# Altium PCB Barracuda3D.PcbDoc (part 2 of 3)
Units mil, origin at the board's own origin, x right, y up, seen from the top; angles counter-clockwise.
Board outline 4143.89 x 2810.03 mil, 5 copper layers (Top Layer, Mid-Layer 1, Groun Plane, Power Plane, Bottom Layer), stack 75.73 mil thick; 242 components, 180 nets, 863 pads, 455 vias.
Unrouted connection lines stored in the file: 270.
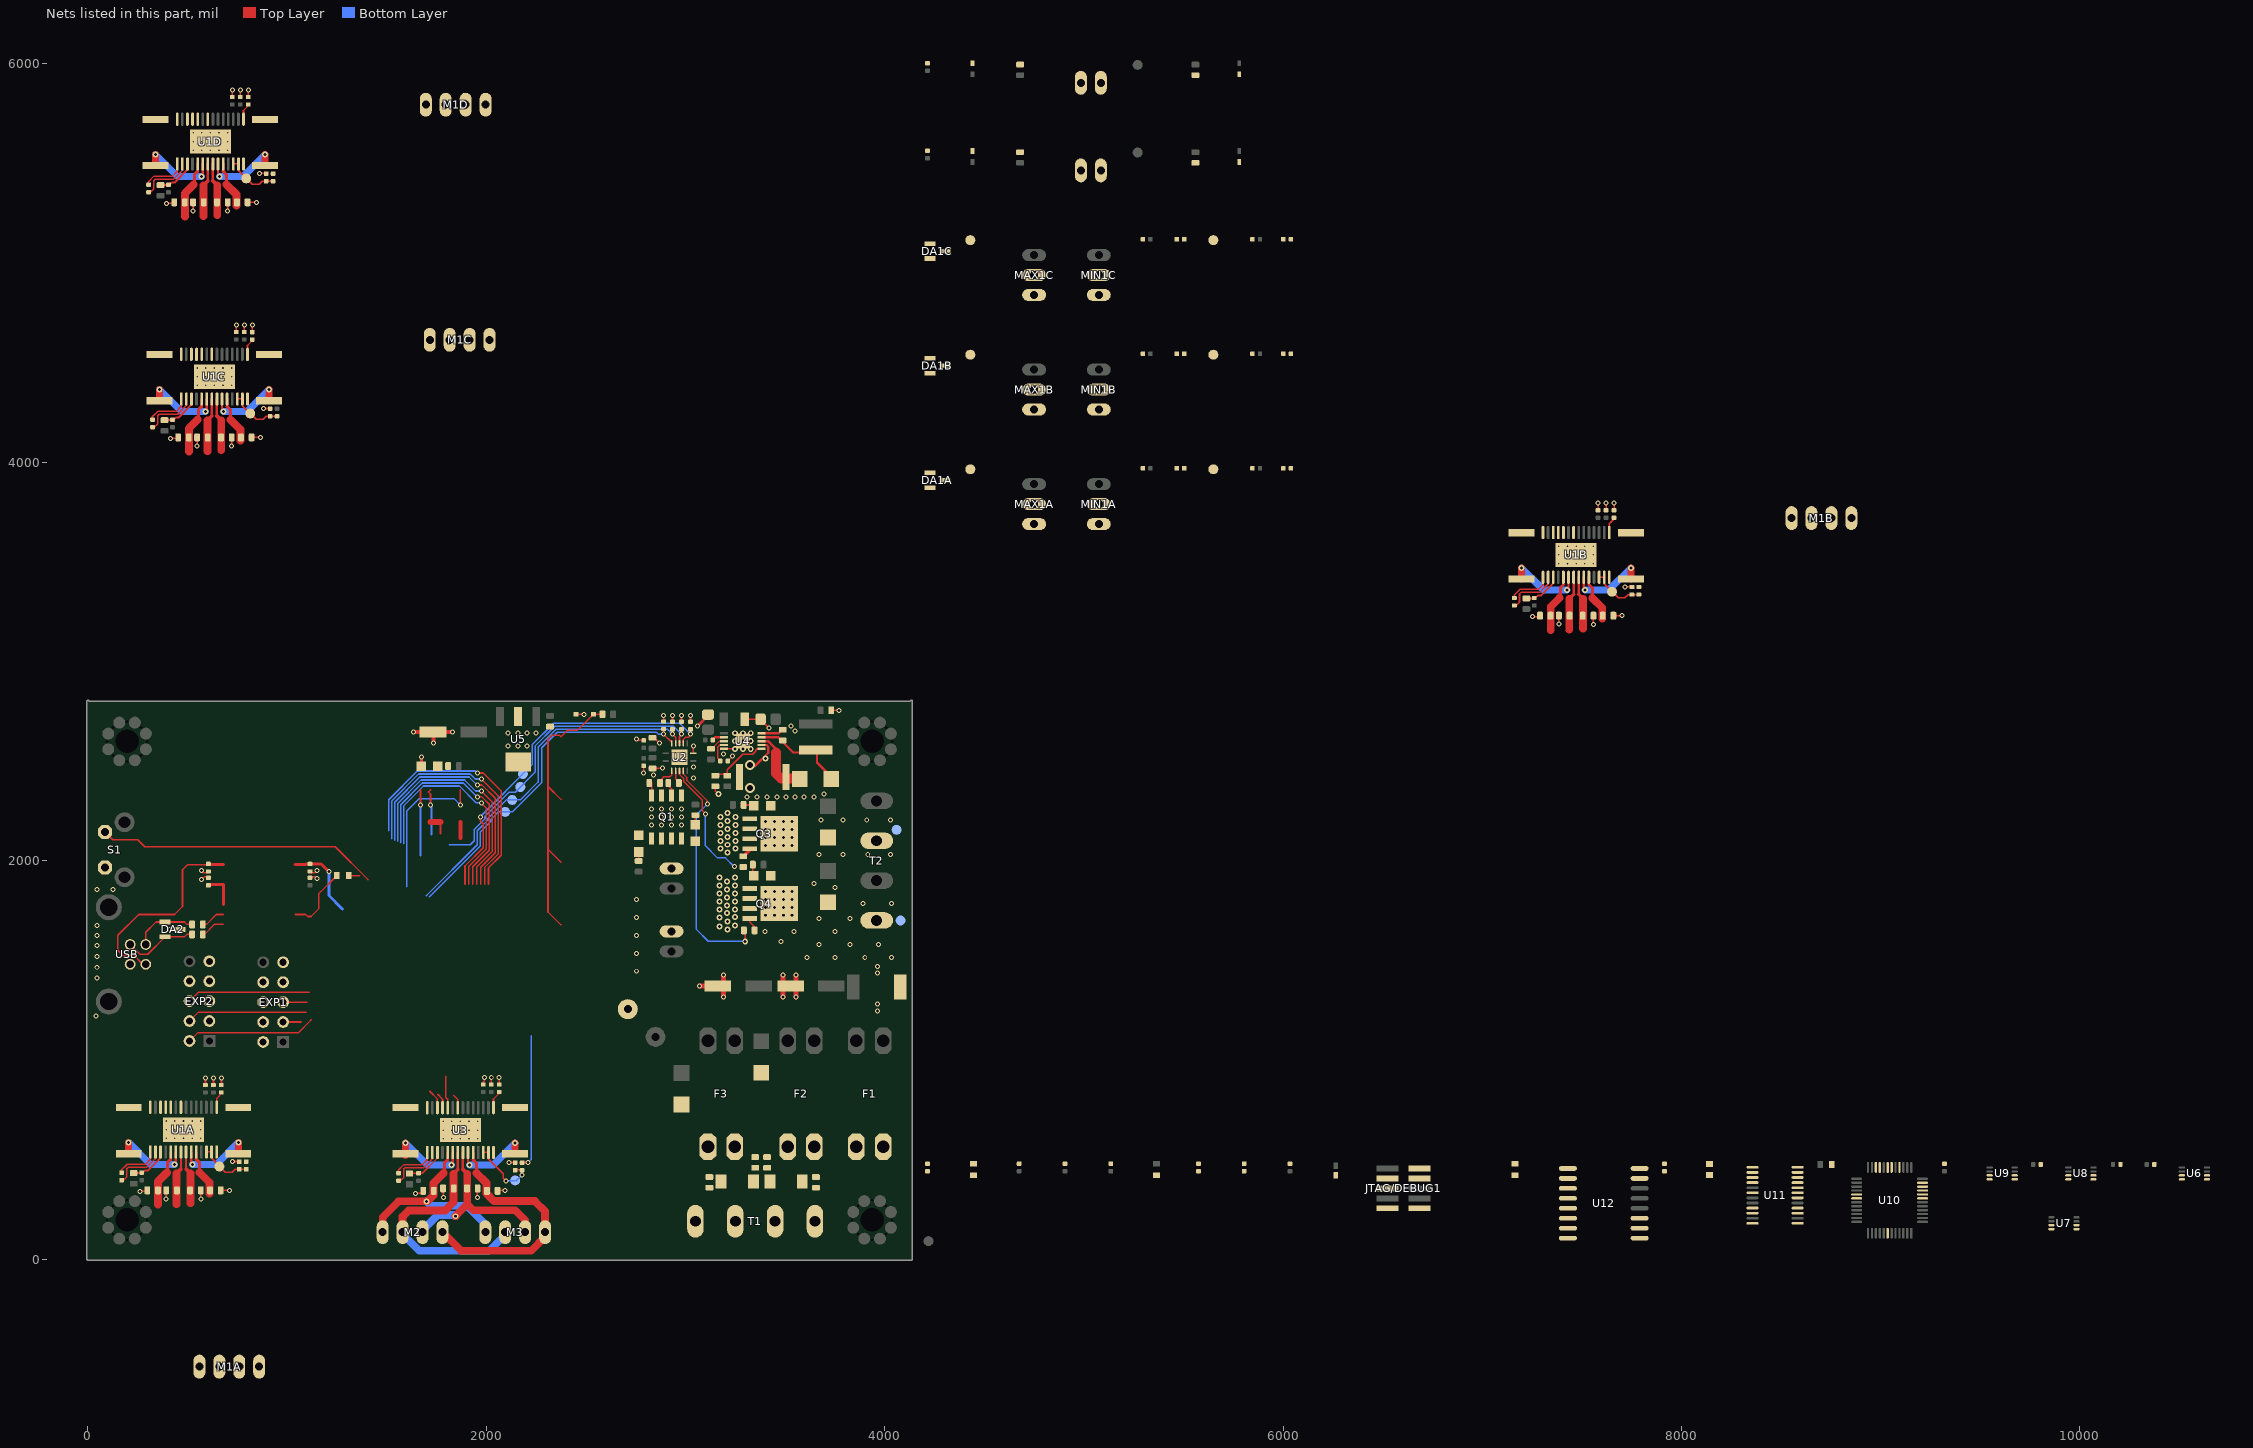
[diagram p4: the nets of this part, all layers, seen from the top]

## Via types
v1: diameter 25, hole 15, Top Layer to Bottom Layer, 207 vias
v2: diameter 30, hole 15, Top Layer to Bottom Layer, tented both sides, 81 vias
v3: diameter 19.68, hole 7.87, Top Layer to Bottom Layer, 79 vias
v4: diameter 25, hole 15, Top Layer to Bottom Layer, tented both sides, 44 vias
v5: diameter 30, hole 15, Top Layer to Bottom Layer, tented bottom, 32 vias
v6: diameter 30, hole 15, Top Layer to Bottom Layer, 10 vias
v7: diameter 50, hole 30, Top Layer to Bottom Layer, 2 vias

## Nets (pads, with @x,y where several pads share a name; then routed paths per layer and width w, separated by ;. In a path a pad name is that pad's centre, name@x,y a point inside that pad or via, vN(x,y) a via of type N, cw(c..) or ccw(c..) an arc to the next point about the centre after c; other vN are vias at no path point) (continued)
GND: C1A.2 C1B.2 C1C.2 C2A.2 C2B.2 C2C.2 C5A.1 C5B.1 C5C.1 C5D.1 C6A.1 C6B.1 C6C.1 C6D.1 C7.2 C8.2 C9.2 C10.2 C11.1 C12.2 C13.1 C14.1 C15.1 C16.1 C19.1 C20.2 C21.2 C22.2 C23.2 C24.2 C25.2 C26.2 C27.2 C29.2 C30.2 C31.2 C32.2 C33.2 C34.1 C35.2 C36.2 C37.2 C38.2 C39.2 C40.2 C41A.2 C41B.2 C41C.2 C41D.2 C42A.2 C42B.2 C42C.2 C42D.2 C43A.2 C43B.2 C43C.2 C43D.2 C44A.2 C44B.2 C44C.2 C44D.2 C45A.2 C45B.2 C45C.2 C45D.2 C46A.2 C46B.2 C46C.2 C46D.2 C57.2 C58.2 C62.2 C63A.2 C63B.2 C64.2 C65.2 C66.2 C67.2 C68.2 C69.2 C70.2 D17.A D18.A D19.A D24A.A D24B.A D25.A DA1A.3 DA1B.3 DA1C.3 EXP1.9 EXP2.9 JTAG/DEBUG1.3 JTAG/DEBUG1.5 JTAG/DEBUG1.9 LED1.C MAX1A.2 MAX1B.2 MAX1C.2 MIN1A.2 MIN1B.2 MIN1C.2 P2A.2 P2B.2 Q1.1 Q1.3 Q3.1 Q3.2 Q3.3 Q4.1 Q4.2 Q4.3 R5A.1 R5B.1 R5C.1 R5D.1 R9.1 R12.1 R15.1 R18.1 R21.1 R22.1 R26.1 R28.2 R31A.1 R31B.1 R31C.1 R31D.1 S1.2 T1.2 T1.4 U1A.14 U1A.28 U1A.29 U1B.14 U1B.28 U1B.29 U1C.14 U1C.28 U1C.29 U1D.14 U1D.28 U1D.29 U2.7 U2.15 U3.14 U3.28 U3.29 U4.5 U4.7 U4.11 U5.2 U5.4 U6.4 U7.4 U8.4 U9.4 U10.5 U10.18 U10.35 U10.42 U11.3 U11.4 U11.9 U11.10 U11.13 U11.16 U11.21 U11.24 U12.9 U12.15 | length 3404.5
  Top Layer w8: v1(260.75,340) C41A.2@293.23,340 ; v1(393.23,302.52) C42A.2@393.23,345 ; v1(395.75,5300) C41D.2@428.23,5300 ; v1(415.75,4120) C41C.2@448.23,4120 ; v1(528.23,5262.52) C42D.2@528.23,5305 ; v1(548.23,4082.52) C42C.2@548.23,4125 ; v1(566.77,301.02) C46A.2@566.77,345 ; C44A.2@590.43,876.2 590.43,909.68 v1(590.75,910) ; C45A.2@630.43,876.2 630.43,909.68 v1(630.75,910) ; C43A.2@666.77,345 v1(710.75,345) ; C5A.1@670.75,876.52 v1(670.75,910) ; v1(701.77,5261.02) C46D.2@701.77,5305 ; v1(721.77,4081.02) C46C.2@721.77,4125 ; C44D.2@725.43,5836.2 725.43,5869.68 v1(725.75,5870) ; v4(725.75,490) C6A.1@754.45,490 ; C44C.2@745.43,4656.2 745.43,4689.68 v1(745.75,4690) ; C45D.2@765.43,5836.2 765.43,5869.68 v1(765.75,5870) ; C45C.2@785.43,4656.2 785.43,4689.68 v1(785.75,4690) ; C43D.2@801.77,5305 v1(845.75,5305) ; C5D.1@805.75,5836.52 v1(805.75,5870) ; C43C.2@821.77,4125 v1(865.75,4125) ; C5C.1@825.75,4656.52 v1(825.75,4690) ; v4(860.75,5450) C6D.1@889.45,5450 ; v4(880.75,4270) C6C.1@909.45,4270 ; C57.2@1115,1914 1121,1920 1140,1920 v1(1150,1910) ; C58.2@1115,1946 1121,1940 1140,1940 v1(1150,1950) ; v1(1645,330) 1670.59,330 C21.2@1683.23,342.64 ; 1770,2135 1770,2195.08 ; C22.2@1783.23,355 1785,353.23 v1(1785,310) ; v1(1955,310) 1955,353.23 C26.2@1956.77,355 ; C24.2@1985,876.64 1985,887.64 1990,892.64 v1(1990,912.64) ; C25.2@2025,876.64 v1(2025,912.64) ; C23.2@2056.77,342.64 2059.13,345 v1(2095,345) ; C19.1@2065,876.34 v1(2065,912.64) ; v4(2115,485) C20.2@2144,485 ; D18.A@2451,2735 v1(2490,2735) ; v1@2755,2605 2788.7,2605 C13.1@2790,2603.7 ; v1(2790,2440) C14.1@2790,2476.3 ; C16.1@2835,2616.77 2843.23,2616.77 v1(2870,2590) ; C15.1@2836.77,2465 v1(2885,2465) ; R9.1@2890,2698.9 v1(2890,2730) ; R12.1@2935,2697.9 v1(2935,2730) ; R15.1@2980,2697.9 v1(2980,2730) ; R18.1@3025,2697.9 v1(3025,2730) ; U2.7@3040,2543.58 v1(3040,2575) ; C29.2@3113.31,2728.31 C29.2@3113.31,2733.43 ; R28.2@3153.32,2378.65 3150,2375.33 3150,2350 v2(3165,2335) ; U4.5@3193.83,2561.06 v6(3248.94,2561.06) ; C32.2@3212.31,2500.43 3235,2523.11 v1(3235,2525) ; C27.2@3297.17,2710 3375,2710 v1(3420,2665) ; C30.2@3731.77,2755 v1(3770,2755) ; v1(7252.05,3225) C41B.2@7284.53,3225 ; v1(7384.53,3187.52) C42B.2@7384.53,3230 ; v1(7558.07,3186.02) C46B.2@7558.07,3230 ; C44B.2@7581.73,3761.2 7581.73,3794.68 v1(7582.05,3795) ; C45B.2@7621.73,3761.2 7621.73,3794.68 v1(7622.05,3795) ; C43B.2@7658.07,3230 v1(7702.05,3230) ; C5B.1@7662.05,3761.52 v1(7662.05,3795) ; v4(7717.05,3375) C6B.1@7745.75,3375
  Top Layer w12: 3351.42,2477.41 3415.88,2541.87 3415.88,2572.35 3407.49,2580.74 U4.7@3382.8,2580.74 U4.7@3372.96,2580.74
  Top Layer w15: LED1.C@1675,2477 v4(1675,2520) ; v1(3060,2675) C29.2@3113.31,2728.31
  Top Layer w20: v1(1635,2645) C33.2@1732.64,2645 v1(1830,2645) ; v1(1735,2590) C33.2@1735,2642.64 ; 1870,2115 1870,2195.08
  Top Layer w25: v1(3070,1370) C65.2@3162.64,1370 ; v1(3190,1315) v1(3190,1425) ; v1(3490,1315) v1(3490,1425) ; v1(3555,1315) v1(3555,1425)
  Top Layer w30: 1720,2195.08 1770,2195.08
  other v1: 3965,1245 3965,1280 3965,1435 3965,1470 2830,2180 2880,2180 2930,2180 2980,2180 2830,2220 2880,2220 2930,2220 2980,2220 2830,2260 2880,2260 2930,2260 2980,2260 3310,2320 3360,2320 3410,2320 3460,2320 3505,2320 3550,2320 3595,2320 3645,2320 3695,2335 3040,2415 2840,2430 3040,2470 3190,2535 2755,2610 3550,2650 3530,2675
  other v2: 3210,1655 3170,1670 3247.98,1675 3210,1695 3170,1715 3247.98,1716.5 3208.78,1736.5 3170,1755 3248.78,1756 3208.78,1776 3170,1795 3248.78,1796 3208.78,1816 3170,1835 3248.78,1836 3208.78,1856 3170,1875 3248.78,1876 3208.78,1896 3170,1915 3248.78,1916 3210,2040 3175,2060 3250,2060 3210,2080 3175,2100 3250,2100 3210,2120 3175,2140 3250,2140 3210,2160 3175,2180 3250,2180 3210,2200 3175,2220 3250,2220 3210,2240 3401,2512
  other v3: 1783.39,604.33 1826.69,604.33 1870,604.33 1913.31,604.33 1956.61,604.33 393.39,606.69 436.69,606.69 480,606.69 523.31,606.69 566.61,606.69 1783.39,647.64 1826.69,647.64 1870,647.64 1913.31,647.64 1956.61,647.64 393.39,650 436.69,650 480,650 523.31,650 566.61,650 1783.39,690.95 1826.69,690.95 1870,690.95 1913.31,690.95 1956.61,690.95 393.39,693.31 436.69,693.31 480,693.31 523.31,693.31 566.61,693.31 2948.35,2498.35 2991.65,2498.35 2948.35,2541.65 2991.65,2541.65 7384.69,3491.69 7427.99,3491.69 7471.3,3491.69 7514.61,3491.69 7557.91,3491.69 7384.69,3535 7427.99,3535 7471.3,3535 7514.61,3535 7557.91,3535 7384.69,3578.31 7427.99,3578.31 7471.3,3578.31 7514.61,3578.31 7557.91,3578.31 548.39,4386.69 591.69,4386.69 635,4386.69 678.31,4386.69 721.61,4386.69 548.39,4430 591.69,4430 635,4430 678.31,4430 721.61,4430 548.39,4473.31 591.69,4473.31 635,4473.31 678.31,4473.31 721.61,4473.31 528.39,5566.69 571.69,5566.69 615,5566.69 658.31,5566.69 701.61,5566.69 528.39,5610 571.69,5610 615,5610 658.31,5610 701.61,5610 528.39,5653.31 571.69,5653.31 615,5653.31 658.31,5653.31 701.61,5653.31
  other v4: 2755,1445 2755,1535 2755,1625 2755,1715 2755,1805 2110,2575 2160,2575 2205,2575 2110,2640 2160,2640 2205,2640 2250,2640
  other v6: 3288.31,2561.06 3327.68,2561.06 3248.94,2600.43 3288.31,2600.43 3327.68,2600.43 3248.94,2639.8 3288.31,2639.8 3327.68,2639.8
  other v7: 3323.31,2365.43 3323.31,2480.43
INPUT_GND: C59.2 C60.2 DA2.3 U12.2 U12.8 USB.4 | length 137.7
  Top Layer w8: v1(410,1655) DA2.3@462.4,1655 ; v1(570,1905) 585,1920 599,1920 C60.2@605,1914 ; v1(570,1950) 580,1940 595,1940 601,1946 C59.2@605,1946
  other v4: 40,1220 45,1410 45,1465 45,1520 45,1575 45,1625 45,1675 45,1855 125,1855
LCD4: EXP1.5 | length 120
  Top Layer w8: EXP1.5@980,1290 1100,1290
LCD5: EXP1.6
LCD6: EXP1.7
LCD7: EXP1.8
LCDE: EXP1.3 | length 90
  Top Layer w8: EXP1.3@980,1190 1070,1190
LCDRS: EXP1.4
MAX_ES1: C2A.1 DA1A.2 MAX1A.1 R2A.1 TP2A.1 | length 1109.8
  Top Layer w8: 1912.8,1883.15 1912.8,1971.58 2000,2058.79 2000,2265 v4(1975,2290)
  Bottom Layer w8: 1585,2085.15 1585,2275 1685,2375 1865,2375 1950,2290 v4(1975,2290)
MAX_ES2: C2B.1 DA1B.2 MAX1B.1 R2B.1 TP2B.1 | length 1203.2
  Top Layer w8: 1952.17,1883.15 1952.17,1968.53 2030,2046.36 2030,2295 v4(1975,2350)
  Bottom Layer w8: 1555,2097.57 1555,2287.43 1672.57,2405 1891.21,2405 1946.21,2350 v4(1975,2350)
MAX_ES3: C2C.1 DA1C.2 MAX1C.1 R2C.1 TP2C.1 | length 1296.6
  Top Layer w8: v4(1975,2410) 2060,2325 2060,2033.93 1991.54,1965.47 1991.54,1883.15
  Bottom Layer w8: 1525,2110 1525,2299.85 1660.15,2435 1920,2435 1945,2410 v4(1975,2410)
MIN_ES1: C1A.1 DA1A.1 MIN1A.1 R1A.1 TP1A.1 | length 1158.4
  Top Layer w8: 1932.48,1883.15 1932.48,1970.05 2015,2052.57 2015,2283.23 1978.23,2320 v4(1955,2320)
  Bottom Layer w8: 1570,2091.36 1570,2281.21 1678.79,2390 1885,2390 v4(1955,2320)
MIN_ES2: C1B.1 DA1B.1 MIN1B.1 R1B.1 TP1B.1 | length 1251.8
  Top Layer w8: v4(1955,2380) 1978.23,2380 2045,2313.23 2045,2040.15 1971.85,1967 1971.85,1883.15
  Bottom Layer w8: 1540,2103.79 1540,2293.64 1666.36,2420 1913.79,2420 1953.79,2380 v4(1955,2380)
MIN_ES3: C1C.1 DA1C.1 MIN1C.1 R1C.1 TP1C.1 | length 1315.4
  Top Layer w8: v4(1955,2440) 1985,2440 2075,2350 2075,2027.72 2011.22,1963.94 2011.22,1883.15
  Bottom Layer w8: 1510,2150 1510,2306.07 1653.93,2450 1945,2450 v4(1955,2440)
MOD0E1: U1A.24 U6.6
MOD0E2: U1B.24 U7.6
MOD0E3: U1C.24 U9.6
MOD0E4: U1D.24
MOD0E_Z: U3.24 U8.6 | length 162.1
  Top Layer w8: 1795.75,917.64 1795.75,812.64 1806.02,802.36 U3.24@1806.02,759.84
MOD1E1: U1A.25 U6.5
MOD1E2: U1B.25 U7.5
MOD1E3: U1C.25 U9.5
MOD1E4: U1D.25
MOD1E_Z: U3.25 U8.5 | length 78
  Top Layer w8: 1755.75,827.64 1780.43,802.95 U3.25@1780.43,759.84
MOD2E1: U1A.26 U6.3
MOD2E2: U1B.26 U7.3
MOD2E3: U1C.26 U9.3
MOD2E4: U1D.26
MOD2E_Z: U3.26 U8.3 | length 99
  Top Layer w8: 1715.75,842.64 1754.84,803.54 U3.26@1754.84,759.84
NetC3A_1: C3A.1 R3A.1 U1A.3 | length 192.4
  Top Layer w10: C3A.1@230.75,431.77 R3A.1@273.62,431.77 ; R3A.1@275.75,433.9 287.61,445.76 302.47,445.76 364.84,508.13 U1A.3@364.84,537.8
NetC3B_1: C3B.1 R3B.1 U1B.3 | length 192.4
  Top Layer w10: C3B.1@7222.05,3316.77 R3B.1@7264.92,3316.77 ; R3B.1@7267.05,3318.9 7278.91,3330.76 7293.77,3330.76 7356.14,3393.13 U1B.3@7356.14,3422.8
NetC3C_1: C3C.1 R3C.1 U1C.3 | length 192.4
  Top Layer w10: C3C.1@385.75,4211.77 R3C.1@428.62,4211.77 ; R3C.1@430.75,4213.9 442.61,4225.76 457.47,4225.76 519.84,4288.13 U1C.3@519.84,4317.8
NetC3D_1: C3D.1 R3D.1 U1D.3 | length 192.4
  Top Layer w10: C3D.1@365.75,5391.77 R3D.1@408.62,5391.77 ; R3D.1@410.75,5393.9 422.61,5405.76 437.47,5405.76 499.84,5468.13 U1D.3@499.84,5497.8
NetC4A_1: C4A.1 U1A.1 | length 219.5
  Top Layer w8: C4A.1@168.74,432.44 168.74,448.31 197.19,476.76 289.63,476.76 313.66,500.79 U1A.1@313.66,537.8
NetC4A_2: C4A.2 U1A.2 | length 273.2
  Top Layer w8: C4A.2@168.74,394.74 177.97,394.74 195.43,412.2 195.43,453.78 203.4,461.76 295.84,461.76 339.25,505.16 U1A.2@339.25,537.8
NetC4B_1: C4B.1 U1B.1 | length 219.5
  Top Layer w8: C4B.1@7160.04,3317.44 7160.04,3333.31 7188.49,3361.76 7280.93,3361.76 7304.96,3385.79 U1B.1@7304.96,3422.8
NetC4B_2: C4B.2 U1B.2 | length 273.2
  Top Layer w8: C4B.2@7160.04,3279.74 7169.27,3279.74 7186.73,3297.2 7186.73,3338.78 7194.7,3346.76 7287.14,3346.76 7330.55,3390.16 U1B.2@7330.55,3422.8
NetC4C_1: C4C.1 U1C.1 | length 219.5
  Top Layer w8: C4C.1@323.74,4212.44 323.74,4228.31 352.19,4256.76 444.63,4256.76 468.66,4280.79 U1C.1@468.66,4317.8
NetC4C_2: C4C.2 U1C.2 | length 273.2
  Top Layer w8: C4C.2@323.74,4174.74 332.97,4174.74 350.43,4192.2 350.43,4233.78 358.4,4241.76 450.84,4241.76 494.25,4285.16 U1C.2@494.25,4317.8
NetC4D_1: C4D.1 U1D.1 | length 219.5
  Top Layer w8: C4D.1@303.74,5392.44 303.74,5408.31 332.19,5436.76 424.63,5436.76 448.66,5460.79 U1D.1@448.66,5497.8
NetC4D_2: C4D.2 U1D.2 | length 273.2
  Top Layer w8: C4D.2@303.74,5354.74 312.97,5354.74 330.43,5372.2 330.43,5413.78 338.4,5421.76 430.84,5421.76 474.25,5465.16 U1D.2@474.25,5497.8
NetC5A_2: C5A.2 U1A.15 | length 88.9
  Top Layer w8: U1A.15@646.34,762.2 646.34,806.34 673.74,833.74 C5A.2@673.74,839.74
NetC5B_2: C5B.2 U1B.15 | length 88.9
  Top Layer w8: U1B.15@7637.64,3647.2 7637.64,3691.34 7665.04,3718.74 C5B.2@7665.04,3724.74
NetC5C_2: C5C.2 U1C.15 | length 88.9
  Top Layer w8: U1C.15@801.34,4542.2 801.34,4586.34 828.74,4613.74 C5C.2@828.74,4619.74
NetC5D_2: C5D.2 U1D.15 | length 88.9
  Top Layer w8: U1D.15@781.34,5722.2 781.34,5766.34 808.74,5793.74 C5D.2@808.74,5799.74
NetC6A_2: C6A.2 R4A.2 TP3A.1 U1A.12 U1A.13 | length 268.3
  Top Layer w7: U1A.12@595.16,537.8 U1A.13@620.75,537.8 620.75,505 690.75,435 725,435 741,451 R4A.2@795,451
NetC6B_2: C6B.2 R4B.2 TP3B.1 U1B.12 U1B.13 | length 268.3
  Top Layer w7: U1B.12@7586.46,3422.8 U1B.13@7612.05,3422.8 7612.05,3390 7682.05,3320 7716.3,3320 7732.3,3336 R4B.2@7786.3,3336
NetC6C_2: C6C.2 R4C.2 TP3C.1 U1C.12 U1C.13 | length 268.3
  Top Layer w7: U1C.12@750.16,4317.8 U1C.13@775.75,4317.8 775.75,4285 845.75,4215 880,4215 896,4231 R4C.2@950,4231
NetC6D_2: C6D.2 R4D.2 TP3D.1 U1D.12 U1D.13 | length 268.3
  Top Layer w7: U1D.12@730.16,5497.8 U1D.13@755.75,5497.8 755.75,5465 825.75,5395 860,5395 876,5411 R4D.2@930,5411
NetC11_2: C11.2 C12.1 U11.6
NetC17_2: C17.2 R19.1 U3.3 | length 201.8
  Top Layer w8: C17.2@1613.74,428.94 1616.18,431.38 1679.04,431.38 1754.84,507.18 U3.3@1754.84,535.43
NetC18_1: C18.1 U3.1 | length 219.5
  Top Layer w8: C18.1@1558.74,430.08 1558.74,445.94 1587.19,474.39 1679.63,474.39 1703.66,498.42 U3.1@1703.66,535.43
NetC18_2: C18.2 U3.2 | length 273.2
  Top Layer w8: C18.2@1558.74,392.38 1567.97,392.38 1585.43,409.84 1585.43,451.42 1593.4,459.39 1685.84,459.39 1729.25,502.8 U3.2@1729.25,535.43
NetC19_2: C19.2 U3.15 | length 88.9
  Top Layer w8: U3.15@2036.34,759.84 2036.34,803.98 2063.74,831.38 C19.2@2063.74,837.38
NetC20_1: C20.1 R20.2 TP16.1 U3.12 U3.13 | length 346.8
  Top Layer w7: U3.12@1985.16,535.43 U3.13@2010.75,535.43 2010.75,502.64 2085.75,427.64 2085.75,406.89 v4(2100,392.64)
  Top Layer w8: C20.1@2151,447.64 2180,447.64 v4(2180,422.64)
  Bottom Layer w8: v4(2100,392.64) TP16.1@2145,392.64 ; TP16.1@2150,392.64 v4(2180,422.64)
NetC21_1: C21.1 M2.4 M3.4 U3.5 | length 1005.1
  Top Layer w12: 1806.02,498.66 U3.5@1806.02,535.43
  Top Layer w15: 1787,432.12 1790.76,435.88 1790.76,483.4 1806.02,498.66
  Top Layer w39: M2.4@1480,135 1480,210 1560,290 1705,290 1735,320 1735,368.95 1735.24,369.19 1735.24,380.36 1787,432.12
  Bottom Layer w39: v2(1700,290) 1725,265 1735.04,265 1737.54,267.5 1902.5,267.5 1995,175 M3.4@1995,135
NetC22_1: C22.1 M2.3 M3.3 U3.7 | length 1229.2
  Top Layer w12: 1857.2,449.84 U3.7@1857.2,535.43
  Top Layer w18: 1835,427.64 1857.2,449.84
  Top Layer w39: M2.3@1580,135 1580,214 1610,244 1794,244 1835,285 1835,427.64
  Bottom Layer w39: M2.3@1580,135 1580,125.1 1663.6,41.5 2015,41.5 2095,121.5 M3.3@2095,135
NetC23_1: C23.1 M2.1 M3.1 U3.10 | length 1276.3
  Top Layer w12: 1933.98,498.66 U3.10@1933.98,535.43
  Top Layer w15: 1933.98,498.66 1951,481.64 1951,431.64
  Top Layer w39: M2.1@1780,135 1873.5,41.5 2225,41.5 2295,111.5 M3.1@2295,135 2295,240 2244,291 2039,291 2001,329 2001,381.64 1951,431.64
NetC26_1: C26.1 M2.2 M3.2 U3.8 | length 946.9
  Top Layer w12: 1882.8,449.84 U3.8@1882.8,535.43
  Top Layer w18: 1882.8,449.84 1905,427.64
  Top Layer w39: v2(1845,215) 1905,275 ; 1905,427.64 1905,275 ; M3.2@2195,135 2195,195 2145,245 1935,245 1905,275
  Bottom Layer w39: M2.2@1680,135 1680,144.9 1756.6,221.5 1838.5,221.5 v2(1845,215)
NetC28_1: C28.1 U4.10 | length 93.7
  Top Layer w12: U4.10@3382.8,2639.8 3383.1,2639.5 3467.5,2639.5 C28.1@3473.77,2645.77
NetC28_2: C28.2 D15.C L1.1 U4.9 | length 475.6
  Top Layer w12: U4.9@3382.8,2620.11 3464.12,2620.11 3492,2592.23 3540.97,2543.26 3660,2543.26 3660,2493.74 D15.C@3742.74,2411
NetC32_1: C32.1 U4.4 | length 112
  Top Layer w8: C32.1@3176.3,2501 3161.52,2515.78 3161.52,2570.29 3171.97,2580.74 U4.4@3193.83,2580.74
NetC36_1: C36.1 FB1.1 U10.6
NetC37_1: C37.1 U10.43
NetC41A_1: C41A.1 M1A.4 U1A.5 | length 290.7
  Top Layer w12: 416.02,501.02 U1A.5@416.02,537.8
  Top Layer w15: 397,434.48 400.76,438.24 400.76,485.76 416.02,501.02
  Top Layer w39: 352.16,273.59 352.16,389.64 397,434.48
NetC41B_1: C41B.1 M1B.4 U1B.5 | length 290.7
  Top Layer w12: 7407.32,3386.02 U1B.5@7407.32,3422.8
  Top Layer w15: 7388.3,3319.48 7392.06,3323.24 7392.06,3370.76 7407.32,3386.02
  Top Layer w39: 7343.46,3158.59 7343.46,3274.64 7388.3,3319.48
NetC41C_1: C41C.1 M1C.4 U1C.5 | length 290.7
  Top Layer w12: 571.02,4281.02 U1C.5@571.02,4317.8
  Top Layer w15: 552,4214.48 555.76,4218.24 555.76,4265.76 571.02,4281.02
  Top Layer w39: 507.16,4053.59 507.16,4169.64 552,4214.48
NetC41D_1: C41D.1 M1D.4 U1D.5 | length 290.7
  Top Layer w12: 551.02,5461.02 U1D.5@551.02,5497.8
  Top Layer w15: 532,5394.48 535.76,5398.24 535.76,5445.76 551.02,5461.02
  Top Layer w39: 487.16,5233.59 487.16,5349.64 532,5394.48
NetC42A_1: C42A.1 M1A.3 U1A.7 | length 271.2
  Top Layer w12: 467.2,452.2 U1A.7@467.2,537.8
  Top Layer w18: 445,430 467.2,452.2
  Top Layer w39: 445,275.75 445,430
NetC42B_1: C42B.1 M1B.3 U1B.7 | length 271.2
  Top Layer w12: 7458.5,3337.2 U1B.7@7458.5,3422.8
  Top Layer w18: 7436.3,3315 7458.5,3337.2
  Top Layer w39: 7436.3,3160.75 7436.3,3315
NetC42C_1: C42C.1 M1C.3 U1C.7 | length 271.2
  Top Layer w12: 622.2,4232.2 U1C.7@622.2,4317.8
  Top Layer w18: 600,4210 622.2,4232.2
  Top Layer w39: 600,4055.75 600,4210
NetC42D_1: C42D.1 M1D.3 U1D.7 | length 271.2
  Top Layer w12: 602.2,5412.2 U1D.7@602.2,5497.8
  Top Layer w18: 580,5390 602.2,5412.2
  Top Layer w39: 580,5235.75 580,5390
NetC43A_1: C43A.1 M1A.1 U1A.10 | length 235.8
  Top Layer w12: 543.98,501.02 U1A.10@543.98,537.8
  Top Layer w15: 543.98,501.02 561,484 561,434
  Top Layer w39: 561,434 611,384 C43A.1@611,329.75
NetC43B_1: C43B.1 M1B.1 U1B.10 | length 235.8
  Top Layer w12: 7535.28,3386.02 U1B.10@7535.28,3422.8
  Top Layer w15: 7535.28,3386.02 7552.3,3369 7552.3,3319
  Top Layer w39: 7552.3,3319 7602.3,3269 C43B.1@7602.3,3214.75
NetC43C_1: C43C.1 M1C.1 U1C.10 | length 235.8
  Top Layer w12: 698.98,4281.02 U1C.10@698.98,4317.8
  Top Layer w15: 698.98,4281.02 716,4264 716,4214
  Top Layer w39: 716,4214 766,4164 C43C.1@766,4109.75
NetC43D_1: C43D.1 M1D.1 U1D.10 | length 235.8
  Top Layer w12: 678.98,5461.02 U1D.10@678.98,5497.8
  Top Layer w15: 678.98,5461.02 696,5444 696,5394
  Top Layer w39: 696,5394 746,5344 C43D.1@746,5289.75
NetC46A_1: C46A.1 M1A.2 U1A.8 | length 266.2
  Top Layer w12: 492.8,452.2 U1A.8@492.8,537.8
  Top Layer w18: 492.8,452.2 515,430
  Top Layer w39: 515,280.75 515,430
NetC46B_1: C46B.1 M1B.2 U1B.8 | length 266.2
  Top Layer w12: 7484.1,3337.2 U1B.8@7484.1,3422.8
  Top Layer w18: 7484.1,3337.2 7506.3,3315
  Top Layer w39: 7506.3,3165.75 7506.3,3315
NetC46C_1: C46C.1 M1C.2 U1C.8 | length 266.2
  Top Layer w12: 647.8,4232.2 U1C.8@647.8,4317.8
  Top Layer w18: 647.8,4232.2 670,4210
  Top Layer w39: 670,4060.75 670,4210
NetC46D_1: C46D.1 M1D.2 U1D.8 | length 266.2
  Top Layer w12: 627.8,5412.2 U1D.8@627.8,5497.8
  Top Layer w18: 627.8,5412.2 650,5390
  Top Layer w39: 650,5240.75 650,5390
NetC59_1: C59.1 U12.1 USB.1 | length 1015.3
  Top Layer w8: USB.1@276,1480 231,1525 175,1525 150,1550 150,1625 255,1730 435,1730 475,1770 475,1955 500,1980 C59.1@608.7,1980
  Top Layer w15: C59.1@608.7,1980 679.88,1980
NetC60_1: C60.1 U12.3 U12.4 U12.5 | length 176.4
  Top Layer w8: C60.1@605,1876.3 C60.1@608.7,1880
  Top Layer w15: C60.1@608.7,1880 679.88,1880 679.88,1830 679.88,1780
NetC67_1: C67.1 C69.1 FB5.1 FB6.1 T1.3
NetC68_1: C68.1 F2.1 FB5.2
NetC70_1: C70.1 F3.1 FB6.2
NetD5_A: D5.A R7.1 | length 41.9
  Top Layer w8: D5.A@3050,2186.34 R7.1@3050,2228.23
NetD5_C: D5.C FAN-1.2 Q1.7
NetD6_A: D6.A R10.1 | length 35.1
  Top Layer w8: R10.1@2765.01,1998.54 D6.A@2765,2033.66
NetD6_C: D6.C FAN-2.2 Q1.5
NetD7_A: D7.A D8.C Q3.5 T2.3 TP12.1
  other v1: 3670,2030 3790,2030 3915,2030 4030,2030 3680,2205 3790,2205 3910,2205 4030,2205
  other v5: 3400.88,2076.1 3445.88,2076.1 3490.88,2076.1 3535.88,2076.1 3400.88,2116.1 3445.88,2116.1 3490.88,2116.1 3535.88,2116.1 3400.88,2156.1 3445.88,2156.1 3490.88,2156.1 3535.88,2156.1 3400.88,2196.1 3445.88,2196.1 3490.88,2196.1 3535.88,2196.1
NetD8_A: D8.A R13.1 | length 46.9
  Top Layer w10: R13.1@3291.77,2280 D8.A@3338.67,2280
NetD9_A: D9.A R16.1 | length 57.3
  Top Layer w8: R16.1@3338.23,1980 3338.23,1930.43 D9.A@3343.66,1925
NetD9_C: D9.C D10.A Q4.5 T2.1 TP14.1
  other v1: 3610,1515 3750,1515 3900,1515 4035,1515 3670,1580 3825,1580 3970,1580 3480,1595 3400,1645 3545,1645 3750,1645 3670,1710 3825,1710 3890,1785 4035,1785 3750,1865 3645,1885
  other v5: 3400.88,1726.1 3445.88,1726.1 3490.88,1726.1 3535.88,1726.1 3400.88,1766.1 3445.88,1766.1 3490.88,1766.1 3535.88,1766.1 3400.88,1806.1 3445.88,1806.1 3490.88,1806.1 3535.88,1806.1 3400.88,1846.1 3445.88,1846.1 3490.88,1846.1 3535.88,1846.1
NetD15_A: D15.A R26.2 U4.8 | length 341.9
  Top Layer w12: U4.8@3382.8,2600.43 3414.67,2600.43 3453.88,2561.22 3453.88,2542
  Top Layer w50: 3453.88,2542 3453.88,2437.26 3479.14,2412 3494.14,2412 D15.A@3574,2412
NetD18_C: D18.C D23A.C D23B.C R29.1 | length 1470.8
  Top Layer w8: 2311.28,2056.28 2375,1992.56 ; 2311.28,2371.28 2375,2307.56 ; 2375,1677.56 2310,1742.56 2310,2610 2330,2630 2367.56,2630 2375,2622.56 2407.44,2655 2458.31,2655 D18.C@2538.31,2735 R29.1@2583.23,2735
NetF1_1: F1.1 T1.1
NetLED1_A: LED1.A R30.1
NetP2A_1: P2A.1 R43A.1 R44A.2
NetP2B_1: P2B.1 R43B.1 R44B.2
NetQ1_2: Q1.2 R8.2 | length 71.6
  Top Layer w8: R8.2@2918.23,2395 2918.23,2371.77 2930,2360 Q1.2@2930,2328.27
NetQ1_4: Q1.4 R11.2 | length 65
  Top Layer w8: Q1.4@2830,2328.27 R11.2@2830,2393.22
NetQ3_4: Q3.4 R14.2 | length 51.7
  Top Layer w20: R14.2@3290,2021.77 3322.64,2054.42 Q3.4@3322.64,2060
NetQ4_4: Q4.4 R17.2 | length 70
  Top Layer w8: Q4.4@3322.64,1710 3322.64,1692.36 3346.77,1668.23 R17.2@3346.77,1650
NetR5A_2: R5A.2 U1A.9 | length 397.2
  Top Layer w12: U1A.9@518.39,537.8 518.39,481.61 v2(525,475)
  Top Layer w35: R5A.2@755,528.86 v2(755,585)
  Bottom Layer w35: v2(525,475) 645,475 v2(755,585)
NetR5B_2: R5B.2 U1B.9 | length 397.2
  Top Layer w12: U1B.9@7509.69,3422.8 7509.69,3366.61 v2(7516.3,3360)
  Top Layer w35: R5B.2@7746.3,3413.86 v2(7746.3,3470)
  Bottom Layer w35: v2(7516.3,3360) 7636.3,3360 v2(7746.3,3470)
NetR5C_2: R5C.2 U1C.9 | length 397.2
  Top Layer w12: U1C.9@673.39,4317.8 673.39,4261.61 v2(680,4255)
  Top Layer w35: R5C.2@910,4308.86 v2(910,4365)
  Bottom Layer w35: v2(680,4255) 800,4255 v2(910,4365)
NetR5D_2: R5D.2 U1D.9 | length 397.2
  Top Layer w12: U1D.9@653.39,5497.8 653.39,5441.61 v2(660,5435)
  Top Layer w35: R5D.2@890,5488.86 v2(890,5545)
  Bottom Layer w35: v2(660,5435) 780,5435 v2(890,5545)
NetR6_2: R6.2 U11.1 U11.12 U11.15 U11.18 U11.19 U11.22
NetR8_1: R8.1 U2.12 | length 62.9
  Top Layer w8: U2.12@2950.32,2451.1 2950.32,2411.45 R8.1@2966.77,2395
NetR11_1: R11.1 U2.13 | length 93.9
  Top Layer w8: R11.1@2881.77,2395 2881.77,2411.77 2890.68,2420.68 2920.68,2420.68 2930.63,2430.63 U2.13@2930.63,2451.1
NetR14_1: R14.1 U2.11 | length 618.4
  Top Layer w8: U2.11@2970,2451.1 2970,2433.16 2992.34,2410.82 2992.34,2396.45 3085,2303.79 3085,2250 v1(3100,2235)
  Bottom Layer w8: v1(3100,2235) 3100,2075.03 3161.03,2014 3201,2014 v1(3245,1970)
NetR17_1: R17.1 U2.10 | length 1211.4
  Top Layer w8: U2.10@2989.69,2466.1 2989.69,2434.69 3007.34,2417.04 3007.34,2402.66 3110,2300 v4(3110,2285) ; R17.1@3293.23,1650 3300,1643.23 v2(3300,1595)
  Bottom Layer w8: v4(3110,2285) 3055,2230 3055,1655 3115,1595 v2(3300,1595)
NetR21_2: R21.2 U3.9 | length 388.7
  Top Layer w12: U3.9@1908.39,535.43 1908.39,479.25 v2(1915,472.64)
  Top Layer w35: R21.2@2145,535 v2(2145,582.64)
  Bottom Layer w35: v2(1915,472.64) 2035,472.64 v2(2145,582.64)
NetR22_2: R22.2 U3.6 | length 404.1
  Top Layer w12: v2(1825,472.64) 1831.61,479.25 U3.6@1831.61,535.43
  Top Layer w35: R22.2@1595,519.69 v2(1595,582.64)
  Bottom Layer w35: v2(1595,582.64) 1705,472.64 v2(1825,472.64)
NetR23_1: R23.1 U4.2 | length 56.9
  Top Layer w12: R23.1@3140.68,2611.05 3149.73,2620.11 U4.2@3193.83,2620.11
NetR24_1: R24.1 S1.1 | length 1419.2
  Top Layer w8: S1.1@86,2144 125,2105 250,2105 285,2070 1241.21,2070 1406.21,1905
NetR25_1: R25.1 U4.3 | length 69.1
  Top Layer w8: R25.1@3138.14,2568.14 3170.43,2600.43 U4.3@3193.83,2600.43
NetR27_2: R27.2 R28.1 U4.6 | length 290.4
  Top Layer w7: R28.1@3146.36,2433.6 R27.2@3202.45,2433.6 ; R27.2@3210,2441.15 3210,2457.67 3287.89,2535.56 3338.25,2535.56 3353.18,2550.49 3353.18,2554.18 3360.06,2561.06 U4.6@3382.8,2561.06
NetR31A_2: R31A.2 U1A.6 | length 397.2
  Top Layer w12: v2(435,475) 441.61,481.61 U1A.6@441.61,537.8
  Top Layer w35: R31A.2@205,528.86 v2(205,585)
  Bottom Layer w35: v2(205,585) 315,475 v2(435,475)
NetR31B_2: R31B.2 U1B.6 | length 397.2
  Top Layer w12: v2(7426.3,3360) 7432.91,3366.61 U1B.6@7432.91,3422.8
  Top Layer w35: R31B.2@7196.3,3413.86 v2(7196.3,3470)
  Bottom Layer w35: v2(7196.3,3470) 7306.3,3360 v2(7426.3,3360)
NetR31C_2: R31C.2 U1C.6 | length 397.2
  Top Layer w12: v2(590,4255) 596.61,4261.61 U1C.6@596.61,4317.8
  Top Layer w35: R31C.2@360,4308.86 v2(360,4365)
  Bottom Layer w35: v2(360,4365) 470,4255 v2(590,4255)
NetR31D_2: R31D.2 U1D.6 | length 397.2
  Top Layer w12: v2(570,5435) 576.61,5441.61 U1D.6@576.61,5497.8
  Top Layer w35: R31D.2@340,5488.86 v2(340,5545)
  Bottom Layer w35: v2(340,5545) 450,5435 v2(570,5435)
PWM0: R9.2 TP10.1 U2.2 | length 1753.9
  Top Layer w8: R9.2@2890,2661 v1(2890,2635) U2.2@2930.63,2594.37
  Bottom Layer w8: 1715,1818.79 1970,2073.79 1970,2144.34 2023.5,2197.84 2023.5,2207.29 2061.21,2245 2131.21,2245 2279,2392.79 2279,2567.23 2356.77,2645 2855,2645 2865,2635 v1(2890,2635)
PWM1: R12.2 TP11.1 U2.3 | length 1817.7
  Top Layer w8: R12.2@2935,2660 v1(2935,2635) 2950.32,2619.68 U2.3@2950.32,2588.9
  Bottom Layer w8: 1700,1825 1955,2080 1955,2150.55 2008.5,2204.05 2008.5,2213.5 2100,2305 TP11.1@2130,2305 2170,2305 2260,2395 2260,2569.45 2350.55,2660 2910,2660 v1(2935,2635)
PWM2: R15.2 TP13.1 U2.4 | length 1621.3
  Top Layer w8: U2.4@2970,2588.9 2970,2625 v1(2980,2635) R15.2@2980,2660
  Bottom Layer w8: 1815,2080 1920,2080 1940,2100 1940,2156.77 1993.5,2210.27 1993.5,2223.5 2114,2344 2144.91,2344 2245,2444.09 2245,2575.66 2344.34,2675 2940,2675 v1(2980,2635)
PWM3: R18.2 TP15.1 U2.5 | length 1807.8
  Top Layer w8: 1893.11,1883.15 1893.11,1973.11 1985,2065 1985,2185 1970,2200 v1(1970,2220) ; U2.5@2989.69,2588.9 2989.69,2609.69 3000,2620 3015,2620 3025,2630 v1(3025,2635) R18.2@3025,2660
  Bottom Layer w8: v1(1970,2220) 1970,2221.21 2230,2481.21 2230,2581.87 2338.13,2690 2970,2690 v1(3025,2635)
R_N: DA2.1 R38.2 USB.2 | length 317.7
  Top Layer w8: USB.2@291,1579.21 291,1641 342.4,1692.4 DA2.1@387.6,1692.4 484.88,1692.4 497.28,1680 R38.2@520.47,1680
R_P: DA2.2 R40.2 USB.3 | length 370.6
  Top Layer w8: USB.3@212,1579.21 261.21,1530 300.48,1530 DA2.2@387.6,1617.12 ; DA2.2@387.6,1617.6 484.88,1617.6 497.28,1630 R40.2@520.47,1630
  Top Layer w15: DA2.2@387.6,1617.12 DA2.2@387.6,1617.6
REF1: R4A.1 U11.2
REF2: R4B.1 U11.23
REF4: R4D.1
REF_Z: R20.1 U11.20 | length 671.7
  Top Layer w8: R20.1@2180,483.9 2181.1,485 v4(2210,485)
  Bottom Layer w8: v4(2210,485) 2225,500 2225,1120
RESET: C62.1 EXP2.8 JTAG/DEBUG1.10 R24.2 R41.1 U10.40 | length 761.5
  Top Layer w8: v1(1870,2280) 1870,2354.92
  Bottom Layer w8: 1600,1870 1600,2248.79 1661.21,2310 1840,2310 v1(1870,2280)
RTRY_ENC1: EXP1.2
RTRY_ENC2: EXP2.3
RTRY_ENC3: EXP2.5
SD_DETECT: EXP2.7
SPD: U10.31
SPI0_CS0: EXP2.4 | length 603.6
  Top Layer w8: EXP2.4@510,1195 555,1240 1095,1240
SPI0_MOSI: EXP2.6 | length 618.6
  Top Layer w8: EXP2.6@510,1295 555,1340 1110,1340
SPI0_SCLK: EXP2.2 | length 653.5
  Top Layer w8: EXP2.2@510,1095 550.53,1135.53 1055.53,1135.53 1120,1200
STEP1: U1A.22
STEP2: U1B.22
STEP3: U1C.22
STEP4: U1D.22
STEP_Z: U3.22 | length 71.7
  Top Layer w8: 1835.75,822.64 1857.2,801.18 U3.22@1857.2,759.84
TCK/SWDCLK: JTAG/DEBUG1.4 U10.45 | length 235.3
  Top Layer w8: v1(1720,2280) 1720,2334.92 1710,2344.92 1720,2354.92
  Bottom Layer w8: v1(1720,2280) 1725,2275 1725,2130
TMS/SWDIO: JTAG/DEBUG1.2 U10.46 | length 329.9
  Top Layer w8: v1(1670,2280) 1670,2354.92
  Bottom Layer w8: 1670,2025 v1(1670,2280)
UD_N: R38.1 U12.6 | length 123.8
  Top Layer w8: R38.1@576.77,1680 595,1680 645,1730 679.88,1730
UD_P: R40.1 U12.7 | length 123.8
  Top Layer w8: R40.1@576.77,1630 585,1630 635,1680 679.88,1680
UI_N: R39.2 U12.11 | length 346.3
  Top Layer w8: 1040.12,1730 1092.89,1730 1102.89,1720 1120,1720 1160,1760 1160,1835.36 1167.32,1842.68 1242.14,1917.5 1245.73,1917.5 R39.2@1253.23,1925
UI_P: R37.2 U12.10
UMCU_N: R39.1 U10.33 | length 58.2
  Top Layer w8: R39.1@1306.77,1925 1365,1925
UMCU_P: R37.1 U10.34
VBUS: C58.1 U10.32 U12.16 | length 402.9
  Top Layer w15: 1040.12,1980 1091.3,1980 1095,1983.7 C58.1@1115,1983.7 1171.3,1983.7 v1(1210,1945)
  Bottom Layer w15: v1(1210,1945) 1210,1825 1277.5,1757.5
pads on no net: EXP2.1 H1.0 H2.0 H3.0 H4.0 JTAG/DEBUG1.6 JTAG/DEBUG1.7 JTAG/DEBUG1.8 S1.3 S1.4 U1A.18 U1A.19 U1A.23 U1A.27 U1B.18 U1B.19 U1B.23 U1B.27 U1C.18 U1C.19 U1C.23 U1C.27 U1D.18 U1D.19 U1D.23 U1D.27 U2.6 U2.8 U2.9 U3.18 U3.19 U3.23 U3.27 U6.1 U6.2 U7.1 U7.2 U8.1 U8.2 U9.1 U9.2 U10.1 U10.2 U10.3 U10.4 U10.7 U10.8 U10.9 U10.10 U10.11 U10.12 U10.13 U10.14 U10.15 U10.16 U10.19 U10.20 U10.21 U10.22 U10.23 U10.24 U10.25 U10.26 U10.27 U10.28 U10.29 U10.30 U10.37 U10.38 U10.39 U10.41 U10.47 U10.48 USB.P$1 USB.P$2
copper on no net: | length 28697.3
  Top Layer w7: 2684.41,537.8 2710,537.8 2710,505 2785,430 2785,409.25 v4(2799.25,395)
  Top Layer w8: 450,2385 450,2308.7 550,2208.7 601.3,2208.7 622.6,2187.4 632.6,2187.4 632.6,2142.6 625,2135 v1(625,2095) ; v1(520,2170) 549,2170 ; v1(585,2135) 585,2171 ; 650,2625 710,2625 800,2535 800,2208.7 753.7,2208.7 732.4,2187.4 715,2187.4 710,2182.4 v1(710,2095) ; 670,2112.6 v1(670,2180) ; v1(765,2130) 765,2171 ; v1(800,2130) 800,2171 ; v1(840,2130) 840,2171 ; 865,2385 865,2295 840,2270 840,2208.7 840.2,2208.9 875,2208.9 896.5,2187.4 922.6,2187.4 915,2179.8 v1(915,2100) ; v1(875,2130) 875,2171 ; v1(955,340) 987.48,340 992.48,345 ; v1(970,1930) 1040.12,1930 ; 997.4,2187.4 1033.5,2187.4 1055,2208.9 1089.8,2208.9 1090,2208.7 1090,2275 1110,2295 1110,2580 1065,2625 ; v1(1000,2100) 1000,2184.8 ; 1040.12,1680 1115.36,1680 1185,1749.64 1185,1825 1227.5,1867.5 ; v1(1055,2135) 1055,2171 ; 1087.48,345 1090,342.48 v1(1090,300) ; v1(1090,2135) 1090,2171 ; v1(1130,2135) 1130,2171 ; v1(1165,2135) 1165,2171 ; v1(1200,2100) 1200,2125 1212.6,2137.6 1212.6,2187.4 1186.5,2187.4 1165,2208.9 1130.2,2208.9 1130,2208.7 1130,2350 1164,2384 1280,2384 ; v1(1260,300) 1260,343.98 1261.02,345 ; v1(1286.21,2100) 1286.21,2186.21 1287.4,2187.4 1307.4,2187.4 1328.9,2208.9 1345,2208.9 1380.2,2208.9 1430,2258.7 1430,2450 1480,2500 1480,2624 ; v1(1330,2135) 1330,2156 1345,2171 ; 1361.02,345 1365,341.02 v1(1365,300) ; 1380,2171 1381,2170 v1(1415,2170) ; v1(1770,2285) 1770,2354.92 ; v1(1820,2280) 1820,2354.92 ; 2218.46,1796.54 2315,1700 2315,1515 2365,1465 2365,1156.07 2565.07,956 2589.91,956 2615,930.91 2615,860 2615,820 2607.64,812.64 2607.64,762.2 ; 2221.65,1708.5 2255,1675.15 2255,1490.15 2305,1440.15 2305,1131.21 2455,981.21 2455,860 2455,830 2479.68,805.32 2479.68,762.2 ; 2227.86,1723.5 2270,1681.36 2270,1496.36 2320,1446.36 2320,1137.43 2495,962.43 2495,920 2495,815 2505.28,804.72 2505.28,762.2 ; 2234.07,1738.5 2285,1687.57 2285,1502.57 2335,1452.57 2335,1143.64 2535,943.64 2535,860 2535,825 2556.46,803.54 2556.46,762.2 ; 2236.62,1757.17 2300,1693.79 2300,1508.79 2350,1458.79 2350,1149.85 2575,924.85 2575,920 2575,815 2582.05,807.95 2582.05,762.2 ; 2240,1483.93 2290,1433.93 2290,1125 2415,1000 2415,920 2415,845 2454.09,805.91 2454.09,762.2 ; 2257.99,394.74 2267.22,394.74 2284.69,412.2 2284.69,453.79 2292.66,461.76 2385.1,461.76 2428.5,505.16 2428.5,537.8 ; 2257.99,432.44 2257.99,448.31 2286.44,476.76 2378.88,476.76 2402.91,500.79 2402.91,537.8 ; v1(2340,1550) 2340,1581 ; v1(2340,1660) 2340,1618.7 2371.26,1618.7 2371.26,1586.3 2375,1582.56 ; v1(2340,1860) 2340,1896 ; v1(2340,1970) 2340,1933.7 2343.74,1937.44 2375,1937.44 ; v1(2340,2175) 2340,2211 ; v1(2340,2285) 2340,2248.7 2371.26,2248.7 2371.26,2216.3 ; v1(2340,2490) 2340,2526 ; v1(2340,2595) 2340,2563.7 2371.26,2563.7 2375,2567.44 ; 2375,1527.44 2375,1500 2390,1485 v1(2390,1480) ; 2375,1622.44 2375,1626.77 2420,1671.77 ; v1(2375,1805) 2375,1842.44 ; 2375,1897.56 2375,1937.44 ; v1(2375,2120) 2375,2157.44 ; 2375,2252.44 2420,2297.44 2420,2301.77 ; v1(2375,2430) 2375,2472.44 ; 2375,2527.56 2375,2567.44 ; v1(2385,300) 2385,342.52 2387.48,345 ; 2420,1618.23 2420,1576.77 2451.77,1545 2565,1545 ; 2420,1838.23 2428.23,1830 v1(2480,1830) ; 2420,1933.23 2420,1891.77 2451.77,1860 2565,1860 ; 2420,1986.77 2375,1941.77 2375,1937.44 ; 2420,2153.23 2423.23,2150 v1(2470,2150) ; 2420,2235 2420,2206.77 2451.77,2175 2565,2175 ; 2420,2468.23 2423.23,2465 2428.23,2470 2433.23,2465 v1(2470,2465) ; 2420,2563.23 2420,2521.77 2451.77,2490 2565,2490 ; 2420,2616.77 2420,2612.44 2375,2567.44 ; 2423.23,1520 v1(2470,1520) ; 2482.48,345 2485,342.48 v1(2485,300) ; v1(2645,825) 2659.74,839.74 2682.99,839.74 ; v1(2655,300) 2655,343.98 ; 2679.69,876.2 2679.69,909.69 v1(2680,910) ; 2684.41,762.2 2684.41,838.32 2682.99,839.74 ; 2710,762.2 2710,810 2718.45,818.45 2718.45,839.74 2682.99,839.74 ; 2719.69,876.2 2719.69,909.69 v1(2720,910) ; 2735.59,762.2 2735.59,806.34 2762.99,833.74 2762.99,839.74 ; 2756.02,345 2771.02,330 v1(2795,330) ; 2760,876.52 v1(2760,910) ; v4(2815,490) 2843.7,490 ; 2844.25,456 2850.25,450 2879.25,450 v4(2879.25,425) ; 2880,488.9 2881.1,490 v4(2910,490)
  Top Layer w10: 2320,431.77 2362.87,431.77 ; 2365,433.9 2376.86,445.76 2391.72,445.76 2454.09,508.13 2454.09,537.8
  Top Layer w12: 2460.51,473.74 2469.51,482.74 2469.51,494.25 2479.69,504.42 2479.69,537.8 ; 2505.28,501.02 2505.28,537.8 ; v2(2524.25,475) 2530.87,481.61 2530.87,537.8 ; 2556.46,452.2 2556.46,537.8 ; 2582.05,452.2 2582.05,537.8 ; 2607.64,537.8 2607.64,481.61 v2(2614.25,475) ; 2633.23,501.02 2633.23,537.8 ; 2658.82,537.8 2658.82,505.43 2684.25,480
  Top Layer w15: v1(250,1755) 250,1789.5 ; v1(285,1755) 285,1789.5 ; 679.88,1630 v1(750,1630) ; 679.88,1930 v1(770,1930) ; 1040.12,1630 v1(1115,1630) ; 2486.25,434.48 2490.01,438.24 2490.01,485.76 2505.28,501.02 ; 2633.23,501.02 2650.25,484 2650.25,434
  Top Layer w18: 2534.25,430 2556.46,452.2 ; 2582.05,452.2 2604.25,430
  Top Layer w25: 90,1293 105,1308 105,1781.22 152.78,1829 250,1829 285,1829 296,1829 335,1790 335,1781
  Top Layer w30: 917.99,376.18 942.95,376.18 965.51,398.74 ; v2@987.99,398.74 v2(997.99,388.74) 997.99,406.22 ; 1346.75,399.98 v2(1357.99,388.74) ; 2312.99,376.18 2337.95,376.18 2360.51,398.74 2382.99,398.74 v2(2392.99,388.74) 2392.99,406.22 2460.51,473.74 ; 2684.25,480 2684.25,458.69 2752.99,389.95 v2(2752.99,388.74)
  Top Layer w35: 2294.25,528.86 v2(2294.25,585) ; 2844.25,528.86 v2(2844.25,585)
  Top Layer w39: 354.64,271.11 448.23,177.52 448.23,132.52 ; 447.48,273.27 548.23,172.52 548.23,132.52 ; 517.48,278.27 648.23,147.52 648.23,132.52 ; 613.48,327.27 748.23,192.52 748.23,132.52 ; 965,135 965,210.75 1046.41,292.16 1046.41,389.64 1091.25,434.48 ; 1065,135 1065,200.75 1139.25,275 1139.25,430 ; 1165,135 1165,230.75 1209.25,275 1209.25,430 ; 1255.25,434 1305.25,384 1305.25,275.25 1265,235 1265,135 ; 2486.25,434.48 2441.41,389.64 2441.41,268.59 2510,200 2510,135 ; 2534.25,430 2534.25,279.95 2610,204.2 2610,135 ; 2604.25,430 2604.25,285.75 2710,180 2710,135 ; 2650.25,434 2700.25,384 2700.25,314.75 2810,205 2810,135
  Top Layer w40: 184,1917 286.31,1917 335,1868.31
  Bottom Layer w8: v1(625,2095) 685,2035 828.79,2035 858.79,2005 967.57,2005 997.57,1975 1358.23,1975 ; v1(710,2095) 730,2075 810,2075 865,2020 973.79,2020 1003.79,1990 1352.02,1990 ; v1(915,2100) 1010,2005 1345.8,2005 ; v1(1000,2100) 1080,2020 1339.59,2020 1360.59,2041 ; v1(1200,2100) 1244,2056 1471,2056 ; v1(1286.21,2100) 1315.21,2071 1431,2071 ; 1750,2081.21 1750,2265 v1(1770,2285) ; 1765,2075 1765,2225 v1(1820,2280) ; 1830,1250 2615,1250 2925,940 2925,505 v4(2910,490) ; 2062.43,2155 2295,2387.57 2295,2475 2315,2495 2315,2570 v1(2340,2595) ; 2100.61,2105.61 2232.5,2237.5 2292.5,2237.5 v1(2340,2285) ; 2142.5,2112.5 2195,2165 2290,2165 2340,2115 v1(2340,1970) ; v4(2799.25,395) 2844.25,395 ; 2849.25,395 v4(2879.25,425)
  Bottom Layer w35: v2(2294.25,585) 2404.25,475 v2(2524.25,475) ; v2(2614.25,475) 2734.25,475 v2(2844.25,585)
  Bottom Layer w40: v6(50,2290) 87,2290 184,2193 184,1917 184,1831 200,1815 200,1712.41 150,1662.41 150,1415 197.25,1367.75 197.25,1254.79 185,1242.54 185,1235 v1(55,1105)

## Polygon pours and split planes (outlines as drawn)
GND on Top Layer "Bottom Layer-No Net" (solid, remove dead copper, pour order 67): 275.75,5760 455.75,5760 455.75,5675 765.75,5675 805.75,5675 805.75,5760 955.75,5760 955.75,5510 800.75,5510 800.75,5460 780.75,5460 779.72,5519.01 781.05,5533.2 780.75,5545 415.75,5545 415.75,5510 275.75,5510
GND on Top Layer "Bottom Layer-No Net" (solid, remove dead copper, shelved, pour order 86): 1305,2180 1305,1925 1625,1925 1650,1950 1650,2180
GND on Top Layer "Bottom Layer-No Net" (solid, remove dead copper, pour order 79): 3390,10 3390,255 3425,290 3540,290 3540,240 3540,10
3.3VCC on Top Layer "Bottom Layer-No Net" (solid, remove dead copper, pour order 78): 1865,2800 1865,2500 1865,2495 1845,2495 1845,2450 2085,2450 2090,2445 2090,2685 2090,2800
GND on Top Layer "Bottom Layer-No Net" (solid, remove dead copper, pour order 77): 2805,2160 2805,2285 2855,2285 2855,2360 2905,2360 2905,2285 2955,2285 2955,2360 3005,2360 3005,2160
GND on Top Layer "Bottom Layer-No Net" (solid, remove dead copper, pour order 75): 4125,1225 3950,1225 3950,1490 4125,1490
GND on Top Layer "Bottom Layer-No Net" (solid, remove dead copper, pour order 64): 2230,800 2410,800 2410,715 2720,715 2760,715 2760,800 2910,800 2910,550 2755,550 2755,500 2735,500 2733.97,559.01 2735.3,573.2 2735,585 2370,585 2370,550 2230,550
GND on Top Layer "Bottom Layer-No Net" (solid, remove dead copper, pour order 65): 1530.75,797.64 1710.75,797.64 1710.75,712.64 2020.75,712.64 2060.75,712.64 2060.75,797.64 2210.75,797.64 2210.75,547.64 2055.75,547.64 2055.75,497.64 2035.75,497.64 2034.72,556.64 2036.05,570.84 2035.75,582.64 1670.75,582.64 1670.75,547.64 1530.75,547.64
+12VCC1 on Top Layer "Bottom Layer-No Net" (solid, remove dead copper, pour order 59): 3310,835 3310,1215 3150,1215 2775,1215 2775,975 2915,835 2975,835
GND on Top Layer "Bottom Layer-No Net" (solid, remove dead copper, pour order 58): 2925,825 3030,825 3030,380 3140,380 3140,10 2925,10
GND on Top Layer "Bottom Layer-No Net" (solid, remove dead copper, pour order 57): 3430,1000 3325,1000 3325,485 3435,485 3435,1000
+12VCC2 on Top Layer "Bottom Layer-No Net" (solid, remove dead copper, pour order 55): 3740,835 3740,1220 3450,1220 3450,1565 3280,1565 3280,1445 3280,1225 3325,1225 3325,1010 3445,1010 3445,835
+12VCC3 on Top Layer "Bottom Layer-No Net" (solid, remove dead copper, pour order 53): 3748.62,835 4138.62,835 4138.62,1215 3940,1215 3940,1490 3623.62,1490 3623.62,1230 3748.62,1230
NetC68_1 on Top Layer "Bottom Layer-No Net" (solid, remove dead copper, pour order 52): 3625,350 3625,385 3680,385 3680,460 3740,460 3740,825 3440,825 3440,485 3515,485 3515,350
NetC70_1 on Top Layer "Bottom Layer-No Net" (solid, remove dead copper, pour order 51): 3150,350 3245,350 3240,355 3240,485 3325,485 3320,490 3320,825 3045,825 3040,820 3040,435 3040,390 3150,390
NetC67_1 on Top Layer "Bottom Layer-No Net" (solid, remove dead copper, pour order 50): 3150,-5 3150,340 3260,340 3255,345 3255,475 3505,475 3505,300 3420,300 3380,260 3380,-5
NetF1_1 on Top Layer "Bottom Layer-No Net" (solid, remove dead copper, pour order 48): 3550,340 3550,190 3550,-5 3940,-5 4136.54,-5 4139.42,-5 4140,-5 4140,-1.54 4140,825 3750,825 3750,450 3685,450 3685,340
NetD5_C on Top Layer "Bottom Layer-No Net" (solid, remove dead copper, pour order 56): 2910,2150 3080,2150 3080,1905 2865,1905 2865,2060 2910,2060
NetD6_C on Top Layer "Bottom Layer-No Net" (solid, remove dead copper, pour order 54): 2900,2150 2740,2150 2740,2085 2740,2080 2800,2080 2800,1800 2800,1745 2820,1725 2820,1595 3020,1595 3020,1705 2970,1705 2855,1820 2855,1840 2855,2070 2900,2070
+12VCC2 on Top Layer "Bottom Layer-No Net" (solid, remove dead copper, pour order 49): 4125,2235 4125,2425 3825,2425 3760,2360 3755,2355 3715,2315 3670,2315 3670,2235
NetD15_A on Top Layer "SMPS" (solid, pour order 72): 3428,2582 3428,2446 3428,2397 3477,2348 3590,2348 3614,2372 3614,2461 3602,2473 3585,2473 3504,2554 3477,2581 3431,2581
NetC28_2 on Top Layer "SMPS" (solid, pour order 74): 3425,2615 3447.77,2592.23 3492,2592.23 3598.23,2486 3614,2486 3630,2470 3630,2394 3668,2356 3754,2356 3772,2374 3772,2456 3772,2569 3726,2615 3715,2626 3443,2626 3428,2626 3425,2623
GND on Top Layer "SMPS" (solid, pour order 76): 3411,2549 3383,2521 3295,2521 3245,2471 3245,2348 3370,2348 3419,2397 3421,2399 3421,2532 3421,2549
NetD7_A on Top Layer "Bottom Layer-No Net" (solid, remove dead copper, pour order 47): 3375,2250 3375,2010 4125,2010 4125,2225 3600,2225 3575,2250 3455,2250 3455,2300 3405,2300 3400,2300 3400,2250
+12VCC3 on Top Layer "Bottom Layer-No Net" (solid, remove dead copper, pour order 46): 3375,2000 3375,1965 3460,1965 3460,1910 3525,1910 3755,1910 3855,1810 4130,1810 4130,2000
NetD9_C on Top Layer "Bottom Layer-No Net" (solid, remove dead copper, pour order 45): 4135,1500 3775,1500 3575,1500 3500,1575 3375,1575 3375,1900 3400,1900 3400,1950 3450,1950 3450,1900 3575,1900 3750,1900 3850,1800 4135,1800
GND on Top Layer "Top Layer-No Net" (solid, remove dead copper, pour order 82): 3272.97,1635 3272.98,1731.5 3277.98,1731.5 3362.98,1731.5 3362.98,1881.5 3282.98,1881.5 3277.98,1886.5 3277.97,1940 3150,1940 3150,1635
GND on Top Layer "Top Layer-No Net" (solid, remove dead copper, pour order 84): 3217.98,2021.5 3277.98,2021.5 3277.98,2081.5 3362.98,2081.5 3362.98,2231.5 3282.98,2231.5 3277.98,2236.5 3277.97,2255 3150,2255 3150,2021.5
GND on Top Layer "Bottom Layer-No Net" (solid, remove dead copper, pour order 87): 3225,2665 3350,2665 3350,2535 3340,2545 3225,2545
GND on Top Layer "Bottom Layer-No Net" (solid, remove dead copper, pour order 88): 2100,2790 2100,2450 2300,2450 2300,2605 2345,2650 2350,2655 2350,2690 2295,2690 2295,2670 2225,2670 2215,2670 2215,2680 2215,2790
+12VCC2 on Bottom Layer "Bottom Layer-No Net" (solid, remove dead copper, pour order 85): 3280,1565 3280,1225 3325,1225 3325,1010 3445,1010 3445,835 3740,835 3740,1220 3450,1220 3450,1565
+12VCC3 on Bottom Layer "Bottom Layer-No Net" (solid, remove dead copper, pour order 83): 3750,835 4125,835 4125,1215 3940,1215 3940,1490 3625,1490 3625,1230 3750,1230
GND on Bottom Layer "Bottom Layer-No Net" (solid, remove dead copper, pour order 81): 350,2790 350,2075 1620,2075 1625,2080 1625,2785
GND on Bottom Layer "Bottom Layer-No Net" (solid, remove dead copper, pour order 80): 2300,1425 2775,1425 2775,2708.5 2301.5,2708.5 2300,2710
GND on Bottom Layer "Bottom Layer-No Net" (solid, remove dead copper, pour order 73): 2785,2305 3695,2305 3790,2400 3795,2405 3795,2790 2785,2790
+12VCC3 on Bottom Layer "Bottom Layer-No Net" (solid, remove dead copper, pour order 71): 4125,1810 4125,2000 3460,2000 3460,1910 3575,1910 3755,1910 3855,1810 4125,1810
NetD7_A on Bottom Layer "Bottom Layer-No Net" (solid, remove dead copper, pour order 70): 4125,2010 4125,2225 3600,2225 3575,2250 3455,2250 3375,2250 3375,2010
NetD9_C on Bottom Layer "Bottom Layer-No Net" (solid, remove dead copper, pour order 69): 4125,1500 4125,1800 3850,1800 3750,1900 3730,1900 3375,1900 3375,1575 3500,1575 3580,1495 3585,1500 3895,1500
INPUT_GND on Bottom Layer "Bottom Layer-No Net" (solid, remove dead copper, pour order 68): 0,1175 270,1175 365,1270 365,1545 395,1575 800,1575 860,1635 860,1975 820,2015 395,2015 380,2000 375,1995 375,1910 345,1880 0,1880
GND on Bottom Layer "Bottom Layer-No Net" (solid, remove dead copper, shelved, pour order 60): 2230,505 2230,1100 2275,1100 2910,1100 2910,995 2910,400 2830,400 2230,400
GND on Bottom Layer "Bottom Layer-No Net" (solid, remove dead copper, pour order 61): 1530.75,502.64 1530.75,1097.64 1575.75,1097.64 2210.75,1097.64 2210.75,992.64 2210.75,397.64 2130.75,397.64 1530.75,397.64
GND on Bottom Layer "Bottom Layer-No Net" (solid, remove dead copper, pour order 62): 835,505 835,1100 880,1100 1515,1100 1515,995 1515,400 1435,400 835,400
GND on Bottom Layer "Bottom Layer-No Net" (solid, remove dead copper, shelved, pour order 63): 145,505 145,1100 190,1100 825,1100 825,995 825,400 745,400 145,400
+12VCC3 on Power Plane (split plane): 4118.78,850.1 3755.1,850.1 3755.1,2004.9 4118.78,2004.9
+5VCC on Power Plane (split plane): 4118.78,2430.1 3805,2430.1 3803.05,2429.71 3801.4,2428.6 3721.4,2348.6 3687.89,2315.1 3147.11,2315.1 3070.1,2392.11 3070.1,2485 3070.1,2780.2 4118.78,2780.2
3.3VCC on Power Plane (split plane): 4118.78,15.08 3325.1,15.08 3325.1,839.9 4118.78,839.9
+12VCC2 on Power Plane (split plane): 4118.78,2015.1 3750,2015.1 3748.05,2014.71 3746.4,2013.6 3745.29,2011.95 3744.9,2010 3744.9,850.1 3325.1,850.1 3325.1,1215 3324.71,1216.95 3323.6,1218.6 3321.95,1219.71 3320,1220.1 3077.11,1220.1 2725.1,1572.11 2725.1,2339.9 3107.89,2339.9 3141.4,2306.4 3143.05,2305.29 3145,2304.9 3690,2304.9 3691.95,2305.29 3693.6,2306.4 3728.6,2341.4 3807.11,2419.9 4118.78,2419.9
3.3VCC on Power Plane (split plane): 3059.9,2485 3059.9,2390 3060.29,2388.05 3061.4,2386.4 3097.69,2350.1 2720,2350.1 2718.05,2349.71 2716.4,2348.6 2715.29,2346.95 2714.9,2345 2714.9,1570 2715.29,1568.05 2716.4,1566.4 3062.69,1220.1 2775,1220.1 2773.05,1219.71 2771.4,1218.6 2770.29,1216.95 2769.9,1215 2769.9,970 2769.9,655.1 15.08,655.1 15.08,2780.2 3059.9,2780.2
+12VCC1 on Power Plane (split plane): 3314.9,15.08 15.08,15.08 15.08,644.9 2775,644.9 2776.95,645.29 2778.6,646.4 2779.71,648.05 2780.1,650 2780.1,970 2780.1,1209.9 3314.9,1209.9
INPUT_GND on Groun Plane (split plane): 854.9,1972.89 854.9,1637.11 797.89,1580.1 395,1580.1 393.05,1579.71 391.4,1578.6 361.4,1548.6 360.29,1546.95 359.9,1545 359.9,1180.1 15.08,1180.1 15.08,1874.9 345,1874.9 346.95,1875.29 348.6,1876.4 378.6,1906.4 379.71,1908.05 380.1,1910 380.1,1992.89 397.11,2009.9 817.89,2009.9
FGND on Groun Plane (split plane): 4118.78,15.08 15.08,15.08 15.08,1169.9 94.9,1169.9 94.9,375 95.29,373.05 96.4,371.4 98.05,370.29 100,369.9 368.13,369.9 368.13,62.52 368.52,60.57 369.62,58.91 371.28,57.81 373.23,57.42 375.18,57.81 376.83,58.91 377.49,59.9 3750,59.9 3751.95,60.29 3753.6,61.4 3754.71,63.05 3755.1,65 3755.1,369.9 4065,369.9 4066.95,370.29 4068.6,371.4 4069.71,373.05 4070.1,375 4070.1,2425 4069.71,2426.95 4068.6,2428.6 4066.95,2429.71 4065,2430.1 3770.1,2430.1 3770.1,2700 3769.71,2701.95 3768.6,2703.6 3766.95,2704.71 3765,2705.1 375,2705.1 373.05,2704.71 371.4,2703.6 370.29,2701.95 369.9,2700 369.9,2430.1 100,2430.1 98.05,2429.71 96.4,2428.6 95.29,2426.95 94.9,2425 94.9,2045.1 15.08,2045.1 15.08,2780.2 4118.78,2780.2
GND on Groun Plane (split plane): 3759.9,2425 3760.29,2423.05 3761.4,2421.4 3763.05,2420.29 3765,2419.9 4059.9,2419.9 4059.9,380.1 3750,380.1 3748.05,379.71 3746.4,378.6 3745.29,376.95 3744.9,375 3744.9,70.1 378.33,70.1 378.33,371.21 378.6,371.4 379.71,373.05 380.1,375 379.71,376.95 378.6,378.6 376.95,379.71 375,380.1 105.1,380.1 105.1,1169.9 365,1169.9 366.95,1170.29 368.6,1171.4 369.71,1173.05 370.1,1175 370.1,1542.89 397.11,1569.9 800,1569.9 801.95,1570.29 803.6,1571.4 863.6,1631.4 864.71,1633.05 865.1,1635 865.1,1975 864.71,1976.95 863.6,1978.6 823.6,2018.6 821.95,2019.71 820,2020.1 395,2020.1 393.05,2019.71 391.4,2018.6 371.4,1998.6 370.29,1996.95 369.9,1995 369.9,1912.11 342.89,1885.1 15.08,1885.1 15.08,2034.9 100,2034.9 101.95,2035.29 103.6,2036.4 104.71,2038.05 105.1,2040 105.1,2419.9 375,2419.9 376.95,2420.29 378.6,2421.4 379.71,2423.05 380.1,2425 380.1,2694.9 3759.9,2694.9

## Keep-outs
Keep-Out Layer:
  lines w10: 10,10 4125,10 4125,2790 10,2790 10,10

## Other copper
Groun Plane (plane layer: these items are gaps in the copper):
  lines w10: 0,2040 100,2040 100,2425 375,2425 375,2700 3690,2700 3765,2700 3765,2425 4065,2425 4065,375 3750,375 3750,65 375,65 ; 5,1880 345,1880 375,1910 375,1995 395,2015 820,2015 860,1975 860,1635 800,1575 395,1575 365,1545 365,1175 10,1175 ; 100,1175 100,375 375,375 ; 373.23,62.52 373.23,372.52
Power Plane (plane layer: these items are gaps in the copper):
  lines w10: 5,650 2775,650 2775,970 2775,1215 3320,1215 3320,10 ; 3065,2800 3065,2485 3065,2390 3145,2310 3690,2310 3725,2345 3805,2425 4125,2425 ; 3075,1215 2720,1570 2720,2345 2937.5,2345 3110,2345 ; 3320,845 4120,845 ; 3750,845 3750,2010 4133.87,2010